# EAGLE board fio_shield_v1.0 (EAGLE 5.00)
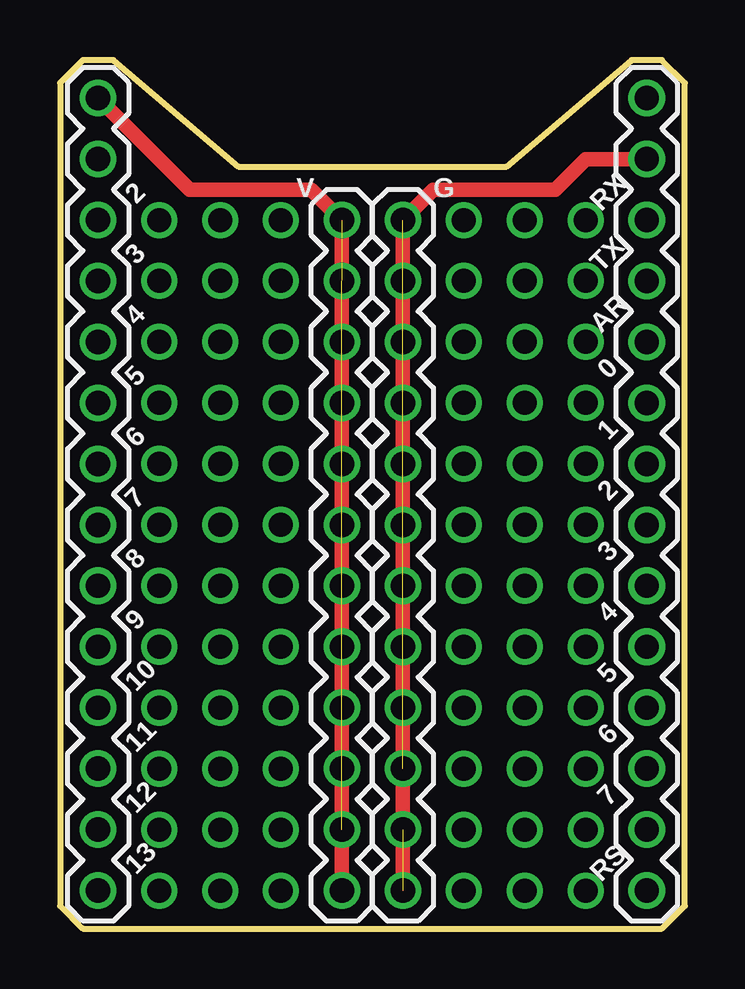
[diagram p0: board, top side]

Size 26.04 x 36.2 mm. Coordinates in mm from the lower left corner, seen from the top.
Outline: 0.95,0 25.08,0 26.04,0.95 26.04,35.24 25.08,36.2 23.81,36.2 18.61,31.75 7.43,31.75 2.22,36.2 0.95,36.2 0,35.24 0,0.95 0.95,0
Copper layers (1*16): Top 0.035mm / dielectric 1.5mm / Bottom 0.035mm
Design rules "p_ban_2layer": minimum track width 5mil, minimum drill 0.3mm, track to track 5mil, track to pad 5mil, pad to pad 5mil, via to via 5mil, smd to smd 5mil, copper to edge 0.5mm, drill to drill 0.3mm, minimum pad ring 0.15mm, minimum via ring 0.15mm, stop-mask expansion 4mil, vias tented up to drill 0.35mm, thermal gap 10mil

## Footprints (pad centres in the part's own frame; a part is rotated, then mirrored left to right if it is on the bottom)
1X14 = drill 1.016 round: 1 0,0; 2 2.54,0; 3 5.08,0; 4 7.62,0; 5 10.16,0; 6 12.7,0; 7 15.24,0; 8 17.78,0; 9 20.32,0; 10 22.86,0; 11 25.4,0; 12 27.94,0; 13 30.48,0; 14 33.02,0
1X12 = drill 1.016 round: 1 0,0; 2 2.54,0; 3 5.08,0; 4 7.62,0; 5 10.16,0; 6 12.7,0; 7 15.24,0; 8 17.78,0; 9 20.32,0; 10 22.86,0; 11 25.4,0; 12 27.94,0

## Placement (x,y rotation side)
JP1  M14  [1X14]  1.59,34.61 270 top
JP2  M14  [1X14]  24.45,34.61 270 top
JP5  M12PTH  [1X12]  11.75,29.53 270 top
JP6  M12PTH  [1X12]  14.29,29.53 270 top

## Library data of the parts
JP1 JP2 JP5 JP6 = SparkFun

## Nets
GND: JP2.2 JP6.1 JP6.2 JP6.3 JP6.4 JP6.5 JP6.6 JP6.7 JP6.8 JP6.9 JP6.10 JP6.11 JP6.12
VCC: JP1.1 JP5.1 JP5.2 JP5.3 JP5.4 JP5.5 JP5.6 JP5.7 JP5.8 JP5.9 JP5.10 JP5.11 JP5.12

## Tracks (layer width: path | path; a pad name or v marks a point on that pad's centre or on a via)
GND  (10 unrouted)
  Top 0.61: JP6.12 JP6.1 15.56,30.8 20.64,30.8 21.91,32.07 JP2.2
N$1  (via drill 1)
  other vias: 4.13,29.53
N$2  (via drill 1)
  other vias: 6.67,29.53
N$3  (via drill 1)
  other vias: 9.21,29.53
N$4  (via drill 1)
  other vias: 16.83,29.53
N$5  (via drill 1)
  other vias: 19.37,29.53
N$6  (via drill 1)
  other vias: 21.91,29.53
N$7  (via drill 1)
  other vias: 4.13,26.99
N$8  (via drill 1)
  other vias: 6.67,26.99
N$9  (via drill 1)
  other vias: 9.21,26.99
N$10  (via drill 1)
  other vias: 4.13,24.45
N$11  (via drill 1)
  other vias: 6.67,24.45
N$12  (via drill 1)
  other vias: 9.21,24.45
N$13  (via drill 1)
  other vias: 4.13,21.91
N$14  (via drill 1)
  other vias: 6.67,21.91
N$15  (via drill 1)
  other vias: 9.21,21.91
N$16  (via drill 1)
  other vias: 4.13,19.37
N$17  (via drill 1)
  other vias: 6.67,19.37
N$18  (via drill 1)
  other vias: 9.21,19.37
N$19  (via drill 1)
  other vias: 4.13,16.83
N$20  (via drill 1)
  other vias: 6.67,16.83
N$21  (via drill 1)
  other vias: 9.21,16.83
N$22  (via drill 1)
  other vias: 4.13,14.29
N$23  (via drill 1)
  other vias: 6.67,14.29
N$24  (via drill 1)
  other vias: 9.21,14.29
N$25  (via drill 1)
  other vias: 4.13,11.75
N$26  (via drill 1)
  other vias: 6.67,11.75
N$27  (via drill 1)
  other vias: 9.21,11.75
N$28  (via drill 1)
  other vias: 4.13,9.21
N$29  (via drill 1)
  other vias: 6.67,9.21
N$30  (via drill 1)
  other vias: 9.21,9.21
N$31  (via drill 1)
  other vias: 4.13,6.67
N$32  (via drill 1)
  other vias: 6.67,6.67
N$33  (via drill 1)
  other vias: 9.21,6.67
N$34  (via drill 1)
  other vias: 4.13,4.13
N$35  (via drill 1)
  other vias: 6.67,4.13
N$36  (via drill 1)
  other vias: 9.21,4.13
N$37  (via drill 1)
  other vias: 4.13,1.59
N$38  (via drill 1)
  other vias: 6.67,1.59
N$39  (via drill 1)
  other vias: 9.21,1.59
N$40  (via drill 1)
  other vias: 16.83,26.99
N$41  (via drill 1)
  other vias: 19.37,26.99
N$42  (via drill 1)
  other vias: 21.91,26.99
N$43  (via drill 1)
  other vias: 16.83,24.45
N$44  (via drill 1)
  other vias: 19.37,24.45
N$45  (via drill 1)
  other vias: 21.91,24.45
N$46  (via drill 1)
  other vias: 16.83,21.91
N$47  (via drill 1)
  other vias: 19.37,21.91
N$48  (via drill 1)
  other vias: 21.91,21.91
N$49  (via drill 1)
  other vias: 16.83,19.37
N$50  (via drill 1)
  other vias: 19.37,19.37
N$51  (via drill 1)
  other vias: 21.91,19.37
N$52  (via drill 1)
  other vias: 16.83,16.83
N$53  (via drill 1)
  other vias: 19.37,16.83
N$54  (via drill 1)
  other vias: 21.91,16.83
N$55  (via drill 1)
  other vias: 16.83,14.29
N$56  (via drill 1)
  other vias: 19.37,14.29
N$57  (via drill 1)
  other vias: 21.91,14.29
N$58  (via drill 1)
  other vias: 16.83,11.75
N$59  (via drill 1)
  other vias: 19.37,11.75
N$60  (via drill 1)
  other vias: 21.91,11.75
N$61  (via drill 1)
  other vias: 16.83,9.21
N$62  (via drill 1)
  other vias: 19.37,9.21
N$63  (via drill 1)
  other vias: 21.91,9.21
N$64  (via drill 1)
  other vias: 16.83,6.67
N$65  (via drill 1)
  other vias: 19.37,6.67
N$66  (via drill 1)
  other vias: 21.91,6.67
N$67  (via drill 1)
  other vias: 16.83,4.13
N$68  (via drill 1)
  other vias: 19.37,4.13
N$69  (via drill 1)
  other vias: 21.91,4.13
N$70  (via drill 1)
  other vias: 16.83,1.59
N$71  (via drill 1)
  other vias: 19.37,1.59
N$72  (via drill 1)
  other vias: 21.91,1.59
VCC  (10 unrouted)
  Top 0.61: JP5.12 JP5.1 10.48,30.8 5.4,30.8 JP1.1

## Text on the board
tPlace: 2 | V | G | RX | 3 | TX | 4 | AR | 0 | 5 | 6 | 1 | 2 | 7 | 8 | 3 | 9 | 4 | 10 | 5 | 11 | 6 | 7 | 12 | 13 | RS